# EAGLE board CTD_brd (EAGLE 9.6.2)
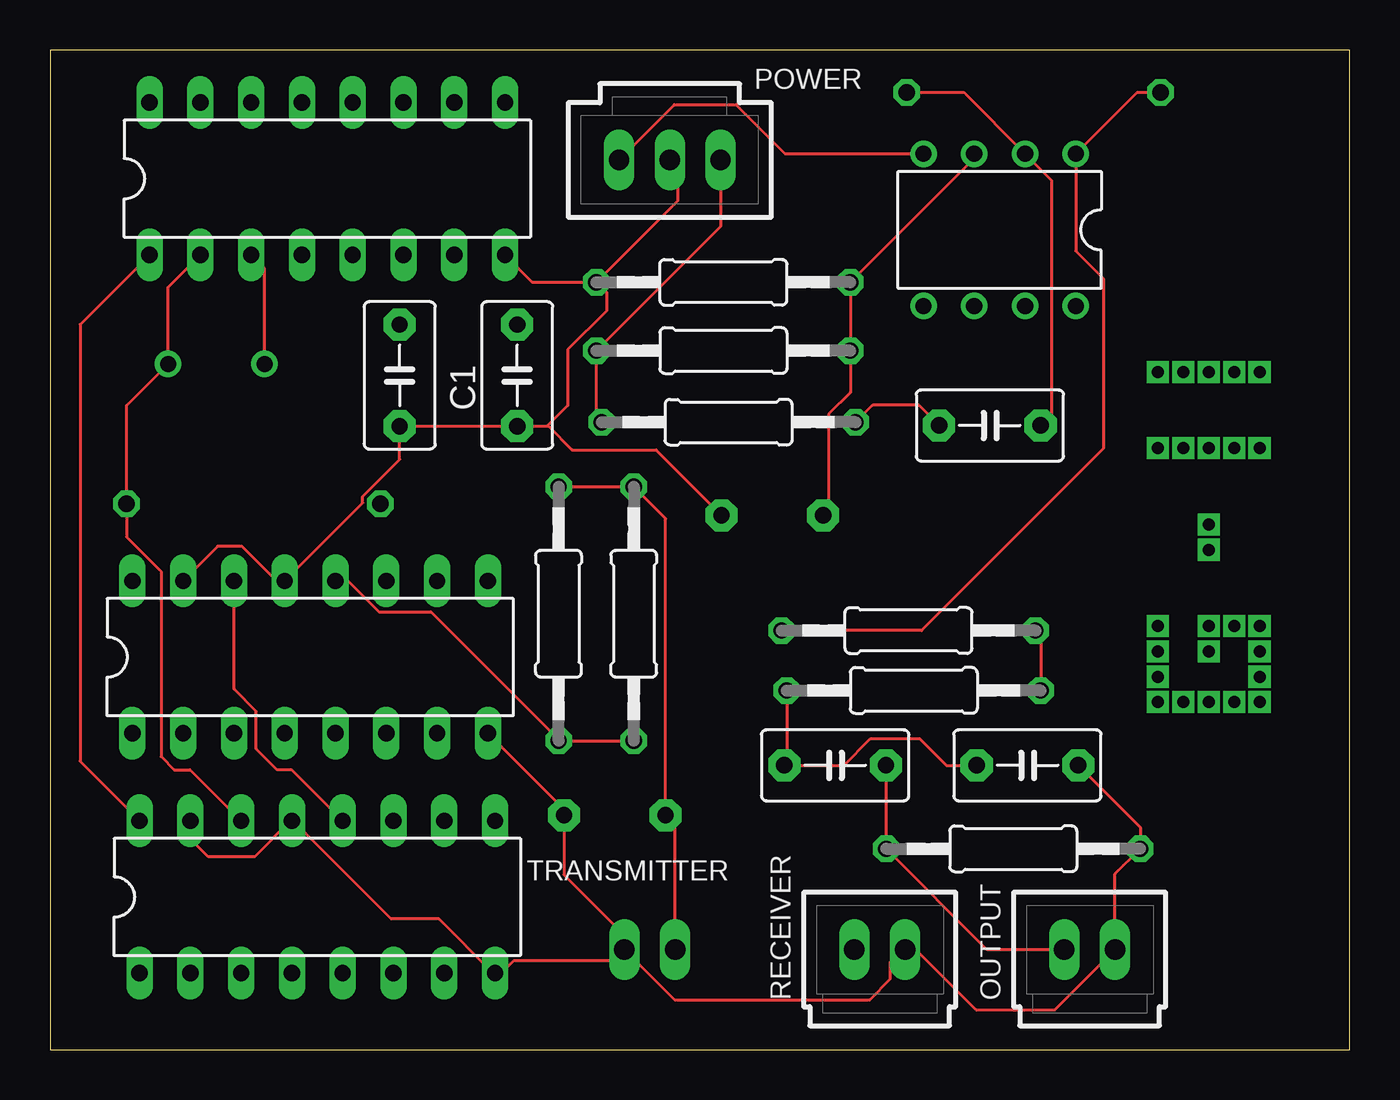
[diagram p0: board, top side]
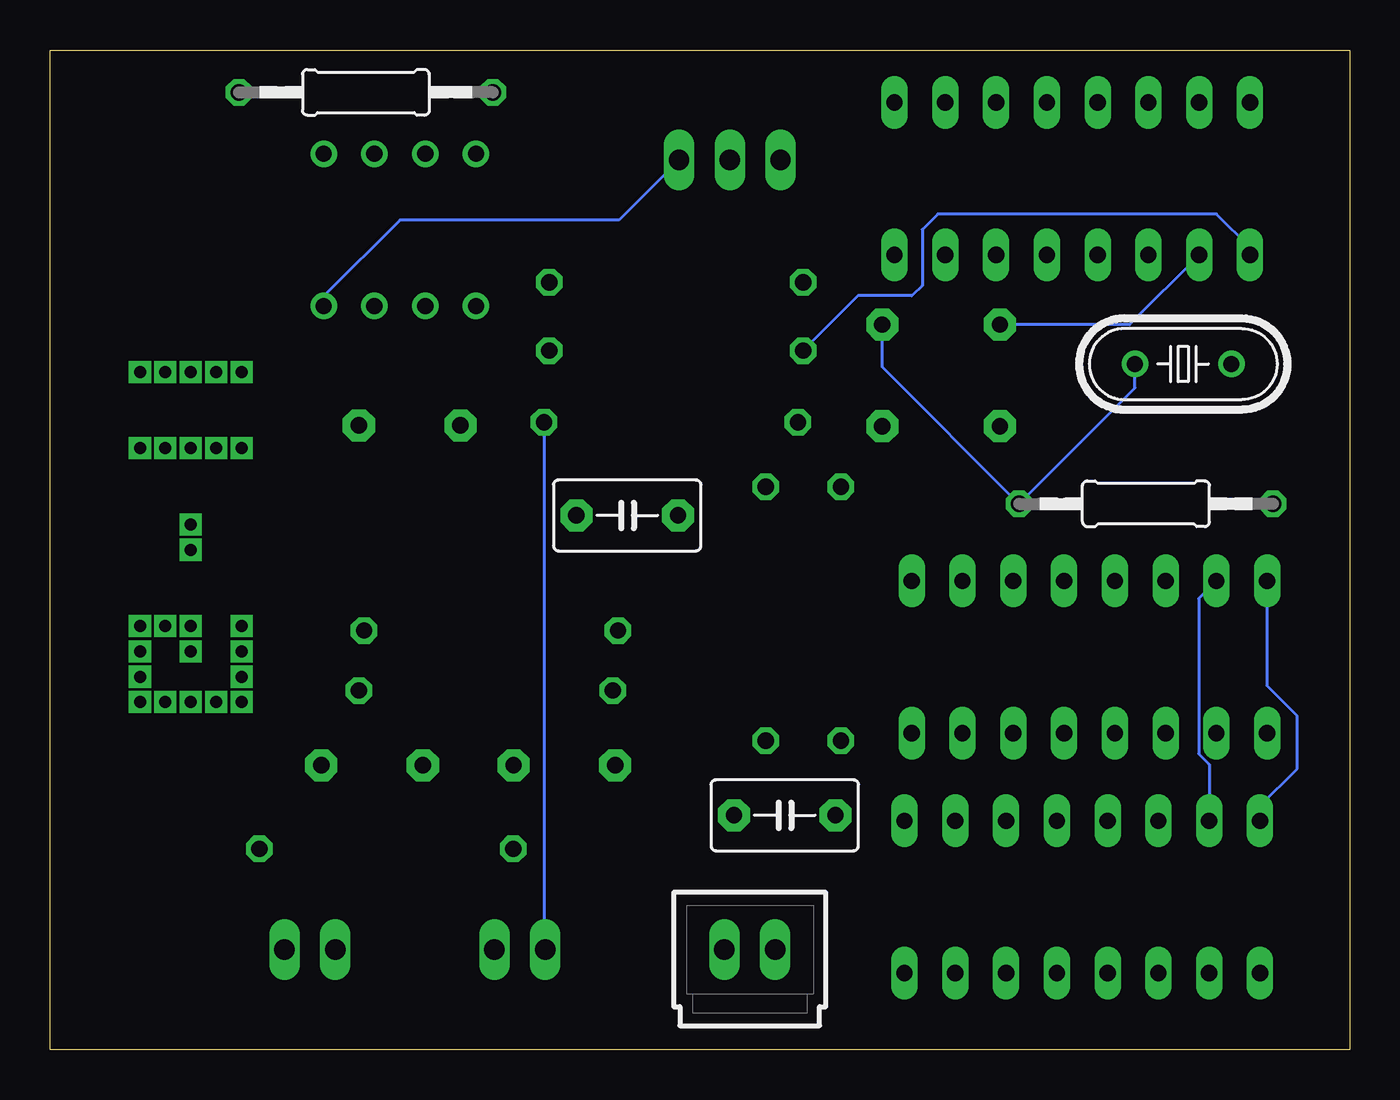
[diagram p1: board, bottom side, seen from below]

Size 65 x 50 mm. Coordinates in mm from the lower left corner, seen from the top.
Outline: 0,0 65,0 65,50 0,50 0,0
Copper layers (1*16): Top 0.035mm / dielectric 1.5mm / Bottom 0.035mm
Design rules "default *": minimum track width 6mil, minimum drill 0.6mm, track to track 6mil, track to pad 6mil, pad to pad 6mil, via to via 6mil, smd to smd 6mil, copper to edge 40mil, drill to drill 6mil, minimum pad ring 10mil, minimum via ring 8mil, stop-mask expansion 4mil, vias tented up to drill 0mil, thermal gap 10mil
Net classes: 0 default: width 0.152 mm, drill 0.6 mm, clearance 0.152 mm

## Footprints (pad centres in the part's own frame; a part is rotated, then mirrored left to right if it is on the bottom)
C5B3.5 = drill 0.813 pad 1.6 octagon: 1 -2.54,0; 2 2.54,0
DIL16 = drill 0.813 long: 1 -8.89,-3.81; 2 -6.35,-3.81; 3 -3.81,-3.81; 4 -1.27,-3.81; 5 1.27,-3.81; 6 3.81,-3.81; 7 6.35,-3.81; 8 8.89,-3.81; 9 8.89,3.81; 10 6.35,3.81; 11 3.81,3.81; 12 1.27,3.81; 13 -1.27,3.81; 14 -3.81,3.81; 15 -6.35,3.81; 16 -8.89,3.81
DIL08 = drill 0.813 pad 1.27: 1 -3.81,-3.81; 2 -1.27,-3.81; 3 1.27,-3.81; 4 3.81,-3.81; 5 3.81,3.81; 6 1.27,3.81; 7 -1.27,3.81; 8 -3.81,3.81
70543-02 = drill 1.016 long: 1 -1.27,0; 2 1.27,0
70543-03 = drill 1.016 long: 1 -2.54,0; 2 0,0; 3 2.54,0
HC49U-V = drill 0.813: 1 -2.413,0; 2 2.413,0
0207/12 = drill 0.813 octagon: 1 -6.35,0; 2 6.35,0
G-11 = drill 0.6 square: P$1 -3.81,5.08; P$2 -5.08,5.08; P$3 -6.35,5.08; P$4 -7.62,5.08; P$5 -7.62,3.81; P$6 -7.62,2.54; P$7 -7.62,1.27; P$8 -7.62,0; P$9 -6.35,0; P$10 -5.08,0; P$11 -3.81,0; P$12 -3.81,1.27; P$13 -3.81,2.54; P$14 -5.08,2.54; P$15 0,2.54; P$16 1.27,2.54; P$17 5.08,5.08; P$18 5.08,3.81; P$19 5.08,2.54; P$20 5.08,1.27; P$21 5.08,0; P$22 8.89,5.08; P$23 8.89,3.81; P$24 8.89,2.54; P$25 8.89,1.27; P$26 8.89,0

## Placement (x,y rotation side)
C1  33pF  [C5B3.5]  17.49,33.72 270 top
C2  33pF  [C5B3.5]  23.37,33.72 270 top
C3  0.1u  [C5B3.5]  28.25,11.72 0 bottom
C4  10u  [C5B3.5]  36.13,26.72 0 bottom
C5  1u  [C5B3.5]  47.01,31.22 0 top
C6  0.01u  [C5B3.5]  48.89,14.22 0 top
C7  0.01u  [C5B3.5]  39.27,14.22 0 top
IC1  4017N  [DIL16]  13.37,7.63 0 top
IC2  4017N  [DIL16]  13.01,19.63 0 top
IC3  4049N  [DIL16]  13.87,43.56 0 top
IC4  TL072P  [DIL08]  47.5,41 180 top
OUTPUT  C-GRID-02-70543  [70543-02]  52,5 0 top
POWER  C-GRID-03-70543  [70543-03]  31,44.5 180 top
Q1  4M  [HC49U-V]  8.32,34.29 0 bottom
R1  1M  [0207/12]  10.18,27.3 0 bottom
R2  100  [0207/12]  25.44,21.8 90 top
R3  100  [0207/12]  29.2,21.8 90 top
R4  68k  [0207/12]  33.68,38.38 0 top
R5  10k  [0207/12]  33.94,31.38 180 top
R6  10k  [0207/12]  49.2,47.88 180 bottom
R7  68k  [0207/12]  33.68,34.96 180 top
R8  330  [0207/12]  42.94,20.96 0 top
R9  100  [0207/12]  43.2,17.96 180 top
R10  330  [0207/12]  48.18,10.04 180 top
RECEIVER  C-GRID-02-70543  [70543-02]  41.5,5 0 top
TRANSMITTER  C-GRID-02-70543  [70543-02]  30,5 0 bottom
U$1  [G-11]  60.5,25 90 top

## Library data of the parts
C1-C7 = capacitor-wima
IC1-IC3 = 40xx
IC4 = linear
OUTPUT POWER RECEIVER TRANSMITTER = con-molex; MF: MOLEX; OC_FARNELL: unknown; OC_NEWARK: unknown
Q1 = crystal; OC_FARNELL: 1666969; OC_NEWARK: unknown
R1-R10 = rcl; SPICEPREFIX: R
U$1 = G-11

## Nets
GND: C1.2 C2.2 C3.2 C4.2 C6.2 IC1.8 IC1.13 IC1.15 IC2.8 IC2.13 IC2.15 IC3.8 OUTPUT.2 POWER.2 R4.1 R10.1 RECEIVER.2 TRANSMITTER.2
N$1: C2.1 IC3.3 Q1.1 R1.1
N$2: C1.1 IC1.14 IC3.2 Q1.2 R1.2
N$3: IC1.12 IC2.14
N$4: IC2.12 R2.1 R3.1
N$5: C3.1 R2.2 R3.2 TRANSMITTER.1
N$6: R8.2 R9.1
N$7: C4.1 IC4.3 R4.2 R7.1
N$8: C5.2 IC4.2 R6.1
N$9: C5.1 R5.1 RECEIVER.1
N$10: IC4.1 R6.2 R8.1
N$11: C6.1 C7.1 R9.2
N$12: C7.2 OUTPUT.1 R10.2
N$16: IC4.4 POWER.3
VDD: IC1.16 IC2.16 IC3.1 IC4.8 POWER.1 R5.2 R7.2

## Tracks (layer width: path | path; a pad name or v marks a point on that pad's centre or on a via)
GND
  Top 0.152: IC1.15 7.02,10.55 7.92,9.65 10.24,9.65 12.1,11.51 | IC2.8 25.71,12.01 C3.2 25.71,8.74 28.73,5.72 TRANSMITTER.2 | TRANSMITTER.2 28.16,4.43 23.18,4.43 22.56,3.82 IC1.8 22.16,3.82 19.45,6.53 17.07,6.53 12.1,11.51 | TRANSMITTER.2 31.23,2.5 41,2.5 42.03,3.53 42.03,4.39 42.65,5 RECEIVER.2 43.31,5 46.31,2 50.27,2 OUTPUT.2 53.27,8.78 R10.1 54.53,11.12 C6.2 | 24.87,31.18 C2.2 C1.2 17.49,29.52 15.64,27.67 15.64,27.34 IC2.13 11.34,23.44 9.61,25.17 8.39,25.17 IC2.15 | 24.87,31.18 24.93,31.18 26.12,29.99 30.32,29.99 C4.2 | IC3.8 24.14,38.37 25.16,38.37 25.17,38.38 R4.1 | R4.1 27.84,37.87 27.84,36.94 25.9,35 25.9,32.21 24.87,31.18 | R4.1 31.39,42.44 31.39,43.15 31,43.54 POWER.2 | 12.1,11.51 IC1.13
  Bottom 0.152: IC1.15 7.02,14.26 7.55,14.79 7.55,22.55 IC2.15
N$1
  Top 0.152: Q1.1 10.73,39.08 IC3.3
  Bottom 0.152: Q1.1 10.73,33.1 R1.1 23.37,34.14 C2.1
N$2
  Top 0.152: IC1.14 7,14 6.21,14 5.56,14.66 5.56,23.92 3.83,25.65 R1.2 3.83,32.21 Q1.2 5.91,38.14 IC3.2
  Bottom 0.152: IC3.2 11.01,36.26 C1.1
N$3
  Top 0.152: IC1.12 12.08,14 11.36,14 10.32,15.03 10.32,16.91 9.2,18.03 IC2.14
N$4
  Top 0.152: R2.1 25.5,15.45 | 25.5,15.45 R3.1 | 25.5,15.45 19.06,21.89 16.45,21.89 14.9,23.44 IC2.12
N$5
  Top 0.152: TRANSMITTER.1 31.27,11.24 C3.1 30.79,26.56 R3.2 R2.2
N$6
  Top 0.152: R8.2 49.55,20.7 R9.1
N$7
  Top 0.152: C4.1 38.94,26.99 38.94,31.78 40.03,32.87 R7.1 R4.2 46.23,44.58 IC4.3
N$8
  Top 0.152: R6.1 45.7,47.88 IC4.2 50.09,43.49 50.09,31.76 C5.2
N$9
  Top 0.152: R5.1 41.14,32.23 43.46,32.23 C5.1
  Bottom 0.152: R5.1 40.29,5.06 RECEIVER.1
N$10
  Top 0.152: R6.2 54.38,47.88 IC4.1 51.31,39.95 52.7,38.56 52.7,30.07 43.59,20.96 R8.1
N$11
  Top 0.152: R9.2 36.85,14.34 C7.1 39.71,14.22 41.05,15.55 43.5,15.55 44.83,14.22 C6.1
N$12
  Top 0.152: OUTPUT.1 46.87,5 R10.2 41.83,14.2 C7.2
N$16
  Top 0.152: IC4.4 36.77,44.81 34.31,47.27 31.23,47.27 POWER.3
VDD
  Top 0.152: IC3.1 1.5,36.27 1.5,14.42 IC1.16 | R5.2 27.33,31.64 R7.2 33.54,41.17 POWER.1
  Bottom 0.152: R7.2 24.59,37.7 21.89,37.7 21.37,38.22 21.37,41.02 20.59,41.8 6.65,41.8 4.98,40.13 IC3.1 | POWER.1 36.54,41.5 47.5,41.5 51.31,37.69 IC4.8 | IC2.16 4.12,18.2 2.62,16.69 2.62,14.04 4.48,12.18 IC1.16